# Altium PCB pcb_xl.PcbDoc
Units mm, origin at the board's own origin, x right, y up, seen from the top; angles counter-clockwise.
Board outline 29 x 100 mm, 2 copper layers (Top Layer, Bottom Layer); 39 components, 36 nets, 144 pads, 44 vias.
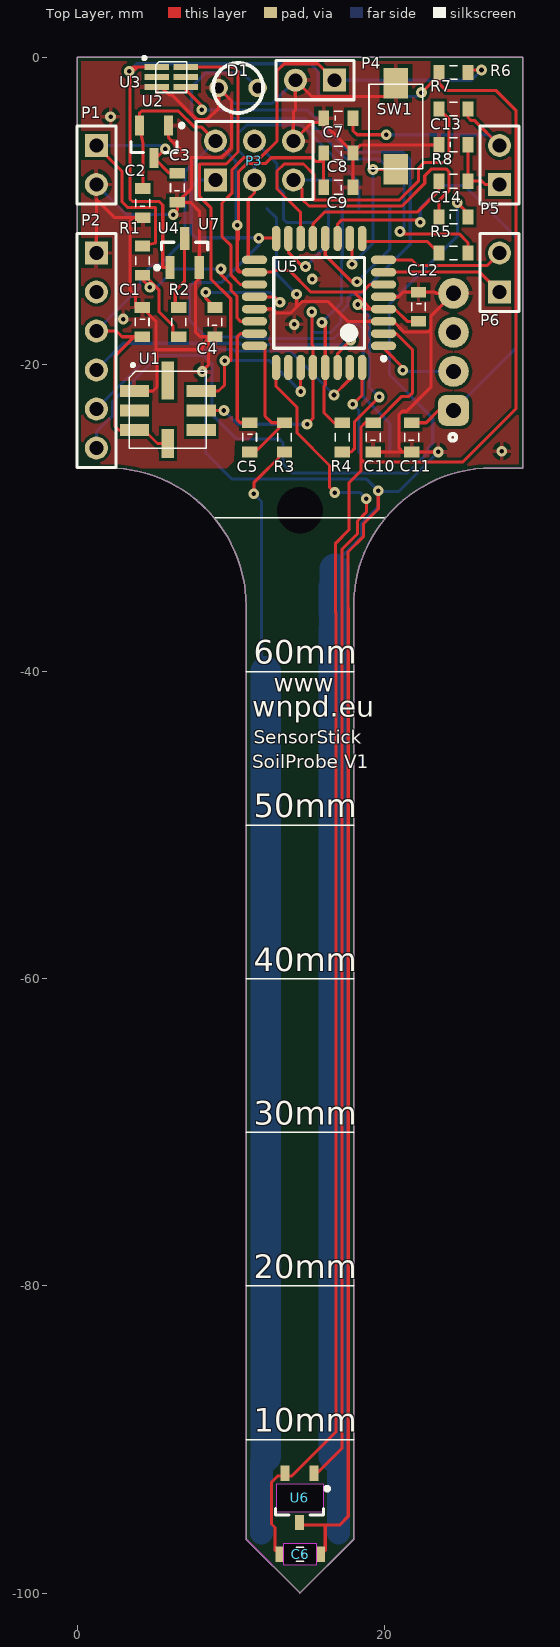
[diagram p0: Top Layer view]
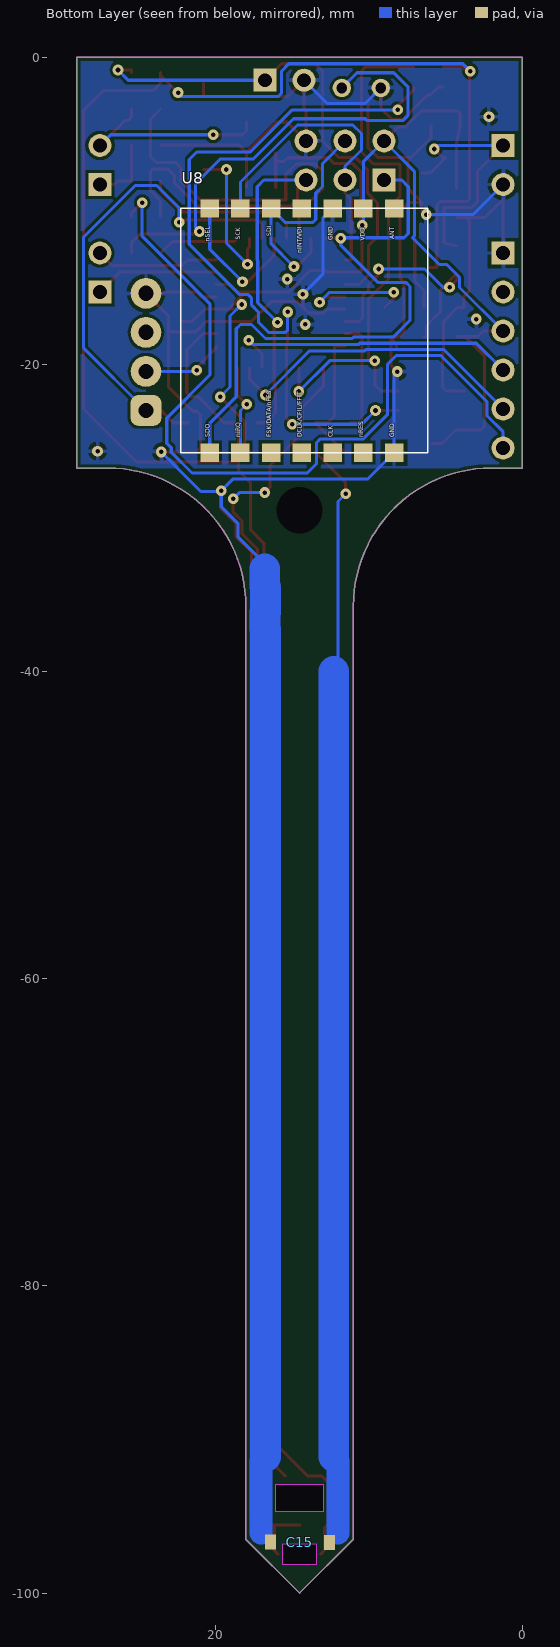
[diagram p1: Bottom Layer view, seen from below]
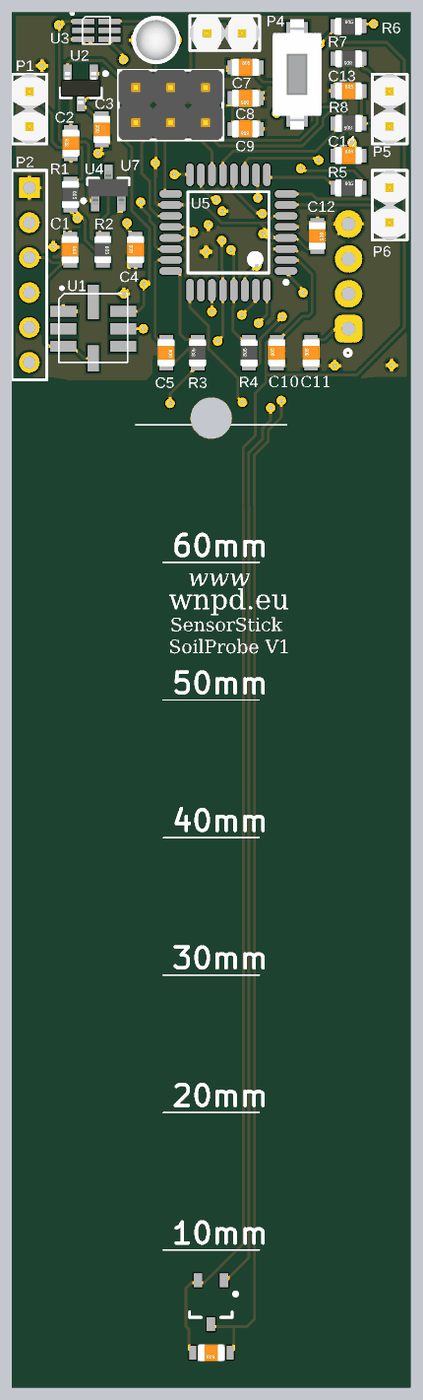
[diagram p2: 3D render of the assembled board from above, using the file's embedded part models]

## Layer stack, top to bottom
Top Layer: signal copper 0.0356
Dielectric: dielectric 0.32, FR-4, Dk 4.8
Bottom Layer: signal copper 0.0356

## Board outline
11,-35.75 ccw(c2,-35.75) 2,-26.75 0,-26.75 0,0 29,0 29,-26.75 27,-26.75 ccw(c27,-35.75) 18,-35.75 18,-96.5 14.5,-100 11,-96.5
cut-out: 12.95,-92.9 12.95,-94.7 16.05,-94.7 16.05,-92.9
cut-out: 13.425,-96.775 13.425,-98.15 15.6,-98.15 15.6,-96.775

## Design rules (kind name [scope] priority, off if disabled: settings)
Clearance "Clearance via" [IsVia vs IsPad] p1: gap=0.5
Clearance Clearance-xPP-xTP-xTT [All] p2: gap=0.2
ComponentClearance [All] p1: gap=0.2 collisioncheckmode=3 verticalgap=0.2 showdistances=FALSE
HoleSize HoleSize-PTH [All] p1: absolutevalues=TRUE maxlimit=4 minlimit=0.25 maxpercent=80.000 minpercent=20.000
HoleToHoleClearance [All] p1: gap=0.15 allowstackedmicrovias=TRUE
Length "Schematic Length Constraint" [InNet('ANTENNA')] p1: maxlimit=164.71 minlimit=164.7
MinimumAnnularRing "Minimum IAR <=0.45mm" [((ObjectKind = 'Pad') OR (ObjectKind = 'Via')) And (Layer = 'MultiLayer') And (HoleDiameter <= AsMM(0.45))] p1: minimumring=0.175 // minimum inner annular ring for pads <= 0.45mm finished hole size
MinimumSolderMaskSliver [All] p1: minsoldermaskwidth=0.1
PolygonConnect [All] p1: connectstyle=Relief reliefconductorwidth=0.254 reliefentries=4 polygonreliefangle="90 Angle" airgapwidth=0.254
RoomDefinition SoilProbe [InComponentClass('SoilProbe')] p1: confinementstyle=ConfineIn formatcopy=TRUE lockcomponents=FALSE outline -16.8,-51.75 -1,-51.75 -1,-47.25 -16.8,-47.25
RoomDefinition SensVoltageBatt [InComponentClass('SensVoltageBatt')] p2: confinementstyle=ConfineIn formatcopy=TRUE lockcomponents=FALSE outline 59.3,-21.275 72.75,-21.275 72.75,-14.275 59.3,-14.275
RoomDefinition SensorOutput [InComponentClass('SensorOutput')] p3: confinementstyle=ConfineIn formatcopy=TRUE lockcomponents=FALSE outline 30.2,-10.725 48.75,-10.725 48.75,-2.475 30.2,-2.475
RoomDefinition SensorLDR [InComponentClass('SensorLDR')] p4: confinementstyle=ConfineIn formatcopy=TRUE lockcomponents=FALSE outline 36.95,13.75 48.7,13.75 48.7,22 36.95,22
RoomDefinition RFM12B [InComponentClass('RFM12B')] p5: confinementstyle=ConfineIn formatcopy=TRUE lockcomponents=FALSE outline 61.25,-43.5 70.5,-43.5 70.5,-24 61.25,-24
RoomDefinition Regulator3v3 [InComponentClass('Regulator3v3')] p6: confinementstyle=ConfineIn formatcopy=TRUE lockcomponents=FALSE outline 19.725,17.7 34.225,17.7 34.225,24.7 19.725,24.7
RoomDefinition ArduinoDownload [InComponentClass('ArduinoDownload')] p7: confinementstyle=ConfineIn formatcopy=TRUE lockcomponents=FALSE outline 51.75,-0.08 70,-0.08 70,18.42 51.75,18.42
RoutingVias "RoutingVias <= 0.45mm" [All] p1: holewidth=0.25 width=0.7 viastyle="Through Hole" minholewidth=0.25 minwidth=0.6 maxholewidth=0.5 maxwidth=1 // finishet hole size <= 0.45mm
SilkToSilkClearance [All] p1: silktosilkclearance=0.2
SilkToSolderMaskClearance SilkscreenOverComponentPads [IsPad] p1: minsilkscreentomaskgap=0.2 clearancetoexposedcopper=TRUE
SolderMaskExpansion [All] p1: expansion=0.102
Width Width-xTW [All] p1: maxlimit=4 minlimit=0.2 preferedwidth=0.2
22 further rules are at their usual default settings.

## Classes and differential pairs
component class SoilProbe: C5 C15 R3
component class SensVoltageBatt: R1 R2 U4
component class SensorOutput: C7 C13 P5 R7 R8
component class SensorLDR: P4 R6
component class RFM12B: C8 C9 U8
component class Regulator3v3: C2 C3 U2
component class ArduinoDownload: C14 P2

## Components (designator, comment, footprint, x,y, rotation, side; value= is the part's Value field where it differs from the comment)
C1 "100n" C0805#1 4.25,-17.25 r270 top (schematic designator C14)
C2 "1u" C0805#1 4.25,-9.5 r90 top (schematic designator C10)
C3 "1u" C0805#1 6.5,-8.5 r90 top (schematic designator C9)
C4 "100n" C0805#1 8.95,-17.25 r90 top (schematic designator C1)
C5 "2n2" C0805#1 11.25,-24.75 r270 top (schematic designator C4)
C6 "100n" C0805#2 14.5,-97.5 r180 top (schematic designator C15)
C7 "100n" C0805#1 17,-3.96 r0 top (schematic designator C11)
C8 "10n" C0805#1 17,-6.26 r180 top (schematic designator C7)
C9 "220p" C0805#1 17,-8.5 r180 top (schematic designator C6)
C10 "100n" C0805#1 19.25,-24.75 r90 top (schematic designator C13)
C11 "100n" C0805#1 21.75,-24.75 r90 top (schematic designator C12)
C12 "100n" C0805#1 22.25,-16.25 r270 top (schematic designator C2)
C13 "100n" C0805#1 24.5,-5.68 r0 top (schematic designator C8)
C14 "100n" C0805#1 24.5,-10.38 r0 top (schematic designator C3)
C15 "Soil Probe" C0805#3 14.5,-95.725 r180 bottom (schematic designator C5)
D1 "LED RED" LED-3mm 11.75,-2 r180 top
P1 "9vIN" PH1x2_2.54 1.25,-5.75 r270 top (schematic designator P6)
P2 "Arduino Download interface" PH1x6_2.54 1.25,-12.75 r270 top (schematic designator P3)
P3 "ICSP" PH2x3_2.54 9,-8 r0 top (schematic designator P7)
P4 "Light sensor (LDR)" PH1x2_2.54 16.75,-1.5 r180 top (schematic designator P1)
P5 "SoilAnalogOutput" PH1x2_2.54 27.5,-8.29 r90 top
P6 "Pin Header" PH1x2_2.54 27.5,-15.29 r90 top (schematic designator P2)
R1 "RESISTOR" R0805 4.25,-13.25 r270 top (schematic designator R5)
R2 "RESISTOR" R0805 6.61,-17.25 r270 top (schematic designator R6)
R3 "RESISTOR" R0805 13.5,-24.75 r90 top (schematic designator R4)
R4 "RESISTOR" R0805 17.25,-24.75 r90 top (schematic designator R2)
R5 "RESISTOR" R0805 24.5,-12.75 r0 top (schematic designator R1)
R6 "RESISTOR" R0805 24.5,-1 r0 top (schematic designator R3)
R7 "RESISTOR" R0805 24.5,-3.37 r180 top (schematic designator R8)
R8 "RESISTOR" R0805 24.5,-8.07 r180 top (schematic designator R7)
SW1 "Tact. SMT" "Switch TACT 3.5*6" 20.75,-9 r180 top
U1 "Barometric sensor" BMP085 6,-22.75 r0 top (schematic designator U2)
U2 "MCP1703T" SOT23 5,-5.5 r270 top (schematic designator U8)
U3 "Luminosity sensor" TSL2561 7.25,-1.75 r0 top (schematic designator U5)
U4 "NMOS FDV303N" SOT-23-FET 7,-12.75 r90 top (schematic designator U7)
U5 "ATmega328P-AU" atmel_32A_N 15.75,-16 r180 top (schematic designator U1)
U6 "Soil temp. sensor" SOT-23-TT3_M 14.475,-94.2 r270 top (schematic designator U4)
U7 "Humidity Sensor" DHTXX 24.5,-23 r90 top (schematic designator U3)
U8 "RFM12b / 433Mhz" RFM12_dev 22.25,-25.75 r90 bottom (schematic designator U6)

## Footprints (in the part's own frame and the unit in brackets; to place one, negate y for a bottom-side part, rotate by r counter-clockwise, add the part's x,y. Pads: shape width x height; smd on the part's side, far side on the other; paste and mask are expansions set on the pad)
atmel_32A_N [mm] "Thin QFP, 32-Leads, Body 7x7mm, Pitch 0.8mm, IPC Medium Density"
  oval 1.65x0.55 smd: 1(-4.2,2.8) 2(-4.2,2) 3(-4.2,1.2) 4(-4.2,0.4) 5(-4.2,-0.4) 6(-4.2,-1.2) 7(-4.2,-2) 8(-4.2,-2.8) 17(4.2,-2.8) 18(4.2,-2) 19(4.2,-1.2) 20(4.2,-0.4) 21(4.2,0.4) 22(4.2,1.2) 23(4.2,2) 24(4.2,2.8)
  oval 0.55x1.65 smd: 9(-2.8,-4.2) 10(-2,-4.2) 11(-1.2,-4.2) 12(-0.4,-4.2) 13(0.4,-4.2) 14(1.2,-4.2) 15(2,-4.2) 16(2.8,-4.2) 25(2.8,4.2) 26(2,4.2) 27(1.2,4.2) 28(0.4,4.2) 29(-0.4,4.2) 30(-1.2,4.2) 31(-2,4.2) 32(-2.8,4.2)
  silkscreen extent -4.33,-2.95 2.95,3.75, body extent -3.5,-3.5 3.5,3.5, height 1.2
BMP085 [mm]
  rect 1.9x0.8 smd: 1(-2.274,1.016) 2(-2.274,-0.254) 3(-2.274,-1.524) 5(2.074,-1.524) 6(2.074,-0.254) 7(2.074,1.016)
  rect 0.8x1.9 smd: 4(-0.1,-2.4)
  rect 0.8x2.5 smd: 8(-0.1,1.7)
  silkscreen extent -2.6,-2.7 2.4,2.77, body extent -2.6,-2.7 2.4,2.3, height 1
C0805#1 [mm] "Chip Capacitor; Body 2.0 x 1.2 mm (LxW typ)"
  rect 0.7x1 smd: 1(-0.95,-0.025) 2(0.95,-0.025)
  silkscreen extent -0.25,-0.48 0.25,0.43, body extent -1,-0.65 1,0.6, height 0.78
C0805#2 [mm] "Chip Capacitor; Body 2.0 x 1.2 mm (LxW typ)"
  rect 0.5x1 smd: 1(-1.375,-0.025) 2(1.35,-0.025)
  silkscreen extent -0.25,-0.48 0.25,0.43, body extent -1,-0.65 1,0.6, height 0.78
C0805#3 [mm] "Chip Capacitor; Body 2.0 x 1.2 mm (LxW typ)"
  rect 0.7x1 smd: 1(-1.9,-0.95) 2(1.95,-0.975)
  body extent -1,-0.65 1,0.6, height 0.78
DHTXX [mm] "Sensor Humidity & Temperature"
  rrect50% 2x2 hole 1: 1(0,0)
  round 2 hole 1: 2(2.54,0) 3(5.08,0) 4(7.62,0)
  silkscreen extent -1.97,-0.17 -1.53,0.27, body extent -3.4,1.25 10.85,16.75, height 12
LED-3mm [mm]
  round 1.2 hole 0.7: 1(0,0) 2(2.54,0)
  silkscreen extent -0.36,-1.62 2.9,1.62, body extent -0.39,-1.65 2.91,1.64, height 5.51
PH1x2_2.54 [mm] "Connector; Header; 2 Position"
  rect 1.5x1.5 hole 0.9: 1(0,0)
  round 1.5 hole 0.9: 2(2.54,0)
  silkscreen extent -1.27,-1.27 3.81,1.27, body extent -1.27,-1.27 3.81,1.27, height 8.38
PH1x6_2.54 [mm] "Connector; Header; 6 Position"
  rect 1.5x1.5 hole 0.9: 1(0,0)
  round 1.5 hole 0.9: 2(2.54,0) 3(5.08,0) 4(7.62,0) 5(10.16,0) 6(12.7,0)
  silkscreen extent -1.27,-1.27 13.97,1.27
PH2x3_2.54 [mm] "Connector; Header; 3x2 Position"
  rect 1.5x1.5 hole 0.9: 1(0,0)
  round 1.5 hole 0.9: 2(0,2.54) 3(2.54,0) 4(2.54,2.54) 5(5.08,0) 6(5.08,2.54)
  silkscreen extent -1.27,-1.27 6.35,3.81, body extent -1.27,-1.27 6.35,3.81, height 10.1
R0805 [mm] "0805 SMD Resistor"
  rect 0.7x1 smd: 1(-0.95,0) 2(0.95,0)
  silkscreen extent -0.25,-0.45 0.25,0.45, body extent -1.01,-0.63 0.99,0.62, height 0.78
RFM12_dev [mm] "Wireless; Uni. ISM band FSK transceiver  module;"
  rect 1.2x1.2 smd: 1(0,-1.9) 2(0,-3.9) 3(0,-5.9) 4(0,-7.9) 5(0,-9.9) 6(0,-11.9) 7(0,-13.9) 8(15.9,-13.9) 9(15.9,-11.9) 10(15.9,-9.9) 11(15.9,-7.9) 12(15.9,-5.9) 13(15.9,-3.9) 14(15.9,-1.9)
  silkscreen extent 0,-16.1 15.9,0
SOT23 [mm] "SOT23, 3-Leads, Body 2.9x1.3mm, Pitch 0.95mm, Lead Span 2.4mm, IPC Medium Density"
  rect 1.3x0.6 smd: 1(-1.05,0.95) 2(-1.05,-0.95) 3(1.05,0)
  silkscreen extent -1.17,-1.5 0.7,1.93, body extent -1.17,-1.47 1.17,1.45, height 1
SOT-23-FET [mm] "SOT23, 3-Leads, Body 2.9x1.3mm, Pitch 0.95mm, Lead Span 2.5mm, IPC Medium Density"
  rect 1.5x0.6 smd: 1(-0.95,0.95) 2(0.95,0) 3(-0.95,-0.95)
  silkscreen extent -1.07,-1.5 0.7,1.92, body extent -1.25,-1.46 1.23,1.46, height 0.98
SOT-23-TT3_M [mm] "SOT23, 3-Leads, Body 2.9x1.3mm, Pitch 0.95mm, Lead Span 2.4mm, IPC Low Density"
  rect 1x0.6 smd: 1(-2,-0.95) 2(-2,0.95) 3(1.2,0)
  silkscreen extent -1.12,-1.55 0.7,1.93
"Switch TACT 3.5*6" [mm] "Switch, Tactile"
  rect 1.6x2 smd: 1(0,-1.7) 2(0,-7.3)
  silkscreen extent -1.75,-7.25 1.75,-1.75, body extent -1.75,-8.5 1.75,-0.5, height 9
TSL2561 [mm] "Light intensity sensor"
  rect 1.6x0.4 smd: 1(-2.075,1.1) 2(-2.075,0.45) 3(-2.075,-0.2) 4(-0.176,-0.2) 5(-0.176,0.45) 6(-0.176,1.1)
  silkscreen extent -2.95,-0.55 -0.12,1.77, body extent -2.1,-0.55 -0.13,1.45, height 1

## Part data
C15: library part 18p
D1: library part Red-3mm, "LED, Surface Mount LED Indicator"
P1 P4 P5 P6: library part PH1x2, "Con1x2"
P2: library part PH1x6, "Con1x6"
P3: library part PH2x3, "Header, 3-Pin, Dual row"
R1: library part 100K, "Resistor"
R2 R6: library part 10K, "Resistor"
R3 R4 R7 R8: library part 1K, "Resistor"
R5: library part 560R, "Resistor"
SW1: library part "Pushbutton TACT mini 3.5x6", "Switch"
U1: library part BMP085, "Sensor, Barometric"
U2: library part MCP1703T-3002E/CB, "Regulator, 5v"
U3: library part TSL2561, "Sensor, Illumination"
U4: library part IRLML0100TRPBF, "Transistor"
U5: "8-bit AVR Microcontroller, 32KB Flash, 1KB EEPROM, 2KB SRAM, 32-pin TQFP, Industrial Grade (-40°C to 85°C)"
U6: library part MCP9700AT-E/TT, "Low-Power Linear Active Thermistor IC, 3-Pin SOT-23, Extended Temperature, Tape and Reel"
U7: library part DHT11, "Humidity / Temp Sensor"
U8: library part RFM12b, "Wireless, Transceiver"

## Free pads (board coordinates)
  round 0 hole 3: 3(14.5,-29.5)

## Via types
v1: diameter 0.7, hole 0.3, Top Layer to Bottom Layer, 44 vias

## Nets (pads, with @x,y where several pads share a name; then routed paths per layer and width w, separated by ;. In a path a pad name is that pad's centre, name@x,y a point inside that pad or via, vN(x,y) a via of type N, cw(c..) or ccw(c..) an arc to the next point about the centre after c; other vN are vias at no path point)
3V3: C1.2 C2.2 C8.2 C9.2 C12.2 P2.3 P3.2 R4.1 U1.3 U1.4 U2.2 U5.4 U5.6 U5.18 U8.9 | length 90.1
  Top Layer w0.2: P2.3 2.549,-17.83 2.919,-18.2 3.718,-18.2 ; C1.2 3.718,-18.2 ; C2.2 4.275,-5.631 U2.2 4.05,-3.651 4.202,-3.499 6.58,-3.499 7.615,-4.534 8.074,-4.534 P3.2 ; U1.4 5.229,-25.15 4.353,-24.274 U1.3 2.702,-24.274 2.473,-24.045 2.473,-19.445 3.718,-18.2 ; v1(10.423,-10.943) 10.423,-11.946 ; C9.2 16.05,-6.796 ; C8.2@16.05,-6.225 16.05,-6.796 ; R4.1 17.84,-25.7 18.069,-25.471 18.069,-23.72 v1(19.669,-22.119) ; v1(18.272,-16.1) 18.572,-16.4 19.11,-16.4 ; U5.6 19.051,-14.8 18.551,-15.3 18.031,-15.3 ; C12.2 21.485,-17.2 20.685,-16.4 U5.4 19.11,-16.4 ; 10.423,-13.752 10.423,-11.946 ; 10.423,-13.752 10.423,-13.873 10.55,-14 10.671,-14 ; 10.423,-13.752 10.671,-14 ; 10.423,-11.946 10.49,-11.88 10.49,-7.473 11.033,-6.93 12.25,-6.93 12.63,-6.55 15.284,-6.55 15.53,-6.796 16.05,-6.796 ; 10.671,-14 U5.18 12.72,-14 12.845,-13.875 13.801,-13.875 15.226,-15.3 18.031,-15.3 ; 18.031,-15.3 18.549,-15.828 19.11,-16.4
  Bottom Layer w0.2: P2.3 4.084,-14.996 4.084,-14.332 4.916,-13.5 5.403,-13.5 7.143,-11.76 7.026,-11.643 7.026,-7.434 P3.2 10.35,-6.81 U8.9 10.35,-10.87 v1(10.423,-10.943) ; v1(18.272,-16.1) 19.025,-16.853 19.025,-21.476 v1(19.669,-22.119)
9V0: C3.2 P1.1 R1.1 U2.3 | length 17.3
  Top Layer w0.2: P1.1 2.905,-7.405 2.905,-9.394 3.311,-9.8 5.089,-9.8 5.089,-12.086 R1.1 ; v1(5.737,-5.978) 5.165,-6.55 U2.3 6,-7.55 C3.2
  Bottom Layer w0.2: P1.1 5.509,-5.75 v1(5.737,-5.978)
AN4_SDA: U1.7 U3.6 U5.27 | length 36.3
  Top Layer w0.2: U3.6 10.22,-0.65 10.474,-0.904 10.474,-6.175 9.699,-6.95 7.95,-6.95 7.95,-9.05 8.706,-9.806 8.706,-14.438 10,-15.732 10,-19.757 v1(9.61,-19.757) ; U1.7 9.204,-21.734 9.6,-21.338 v1@9.6,-19.757 ; v1(14.55,-21.764) U5.27
  Bottom Layer w0.2: v1(9.61,-19.757) 12.543,-19.757 v1(14.55,-21.764)
AN5_SCL: U1.6 U3.4 U5.28 | length 47.8
  Top Layer w0.2: U3.4 7.074,-2.124 8.112,-3.162 v1(8.112,-3.425) ; U1.6 v1(9.555,-23.004) ; v1(14.97,-23.897) 15.35,-23.517 U5.28 15.35,-18.766 15.275,-18.69 v1(15.275,-16.582)
  Bottom Layer w0.2: v1(8.112,-3.425) 14.97,-3.425 17.713,-6.168 21.193,-6.168 21.686,-6.661 21.686,-12.189 18.434,-15.441 17.882,-15.441 17.622,-15.701 17.622,-16.147 17.172,-16.597 17.172,-17.265 16.519,-17.918 15.427,-17.918 15.275,-17.766 v1(15.275,-16.582) ; v1(9.555,-23.004) 10.449,-23.897 v1(14.97,-23.897)
ANTENNA: U8.8
AREF: C4.2 U5.20 | length 8.1
  Top Layer w0.2: v1(8.366,-15.312) 8.366,-15.691 C4.2 ; U5.20 12.844,-15.6 v1(13.198,-15.954)
  Bottom Layer w0.2: v1(8.366,-15.312) 12.556,-15.312 v1(13.198,-15.954)
BATTVOLT-ANX: R1.2 R2.2 U5.22 | length 16
  Top Layer w0.2: v1(4.734,-14.982) 4.25,-14.498 R1.2 4.378,-14.2 5.318,-15.14 5.318,-16.557 6.232,-17.471 6.232,-18.2 R2.2@6.385,-18.2 ; v1(9.356,-13.788) 9.382,-13.788 9.382,-14.165 10.017,-14.8 10.017,-15.183 10.4,-15.566 10.4,-16.974 10.626,-17.2 U5.22
  Bottom Layer w0.2: v1(4.734,-14.982) 5.165,-14.982 6.359,-13.788 v1(9.356,-13.788)
D10_SS: U5.12 U8.14 | length 9.5
  Top Layer w0.2: U5.12 16.15,-12.899 17.877,-14.626 v1(18.221,-14.626)
  Bottom Layer w0.2: v1(18.221,-14.626) 20.35,-12.497 U8.14
D11_MOSI: P3.4 U5.15 U8.12 | length 16.1
  Top Layer w0.2: U5.15 13.75,-12.696 14.69,-13.636 v1(14.868,-13.636)
  Bottom Layer w0.2: P3.4 13.014,-6.934 13.014,-8.419 13.446,-8.851 13.446,-10.57 13.641,-10.766 15.434,-10.766 U8.12 16.35,-12.154 v1(14.868,-13.636)
D12_MISO: P3.1 U5.16 U8.1 | length 39.8
  Top Layer w0.2: v1(11.82,-11.782) 12.95,-11.782 U5.16
  Bottom Layer w0.2: P3.1 7.855,-8 7.426,-8.429 7.426,-11.477 7.705,-11.756 11.795,-11.756 v1(11.82,-11.782) 11.82,-12.249 9.407,-14.662 7.578,-14.662 7.309,-14.931 7.309,-17.126 8.408,-18.225 10.983,-18.225 11.076,-18.318 16.722,-18.318 17.635,-17.405 18.348,-17.405 18.625,-17.682 18.625,-22.117 20.35,-23.842 U8.1
D13_SCK: P3.3 U5.17 U8.13 | length 20.6
  Top Layer w0.2: P3.3 11.54,-8.839 11.137,-9.242 11.137,-13.2 U5.17
  Bottom Layer w0.2: P3.3 11.54,-7.108 10.474,-6.042 10.474,-4.969 11.033,-4.41 14.634,-4.41 18.35,-8.126 U8.13
DHT11_DATA: U5.1 U7.2 | length 5.9
  Top Layer w0.2: U5.1 19.95,-18.95 21.375,-20.375 v1(21.195,-20.375)
  Bottom Layer w0.2: v1(21.195,-20.375) 21.11,-20.46 U7.2
DHT11_ENABLE: C11.2 U5.11 U7.1 | length 31.7
  Top Layer w0.2: U5.11 16.95,-10.867 17.228,-10.589 22.184,-10.589 v1(22.336,-10.74) ; C11.2 22.717,-23.8 23.517,-23 U7.1
  Bottom Layer w0.2: v1(22.336,-10.74) 22.336,-9.814 23.8,-8.35 25.203,-8.35 28.559,-11.705 28.559,-18.941 U7.1
DTR: C14.2 P2.6 | length 52.3
  Top Layer w0.2: v1(24.749,-9.47) 25.45,-10.171 C14.2
  Bottom Layer w0.2: P2.6 1.25,-24.395 2.3,-23.345 2.3,-22.426 5.301,-19.425 8.201,-19.425 8.776,-20 8.776,-20.177 8.787,-20.188 8.787,-23.287 10.35,-24.85 13.15,-24.85 13.4,-25.1 13.4,-26.475 14,-27.075 21.5,-27.075 22.854,-25.721 22.854,-25.431 23.15,-25.135 23.15,-23.5 20.344,-20.694 20.344,-16.059 24.749,-11.655 v1(24.749,-9.47)
ENABLE_EXT_SENSORS: C6.2 C10.2 R6.1 U3.1 U4.1 U5.2 U6.1 | length 163.7
  Top Layer w0.2: v1(3.387,-0.91) 3.648,-0.65 3.902,-0.65 ; U3.1 3.902,-0.65 ; U4.1 5.572,-13.7 5.572,-9.629 5.343,-9.4 3.597,-9.4 3.438,-9.242 3.438,-1.114 3.902,-0.65 ; C6.2@13.125,-97.463 12.875,-97.213 12.875,-95.724 12.65,-95.499 12.65,-92.775 13.05,-92.375 13.975,-92.375 16.85,-89.5 16.85,-36.198 16.83,-36.178 16.83,-31.645 17.7,-30.775 17.7,-27.7 18.475,-26.925 18.475,-26.174 ; U5.2 20.786,-18 21.845,-19.059 21.845,-21.838 21.599,-22.084 21.133,-22.084 19.417,-23.8 C10.2 18.75,-23.8 18.475,-24.075 18.475,-25.175 18.475,-26.174 ; v1(22.412,-2.307) R6.1@23.55,-1.169 ; R6.1 R6.1@23.55,-1.169 ; 18.475,-26.174 18.651,-26.35 19.089,-26.35 19.1,-26.361 25.104,-26.361 28.559,-22.907 28.559,-3.45 27.289,-2.18 24.038,-2.18 23.55,-1.693 R6.1@23.55,-1.169
  Bottom Layer w0.2: v1(3.387,-0.91) 3.87,-0.428 15.198,-0.428 15.681,-0.91 15.681,-2.355 15.876,-2.55 15.989,-2.55 16,-2.561 22.209,-2.561 22.412,-2.358 v1(22.412,-2.307)
FU_1: U5.26
FU_2: P6.1 U5.7 | length 8.1
  Top Layer w0.2: U5.7 26.21,-14 P6.1
FU_3: P6.2 U5.8 | length 8
  Top Layer w0.2: U5.8 21.802,-13.2 22.162,-13.56 26.69,-13.56 P6.2
GND: C1.1 C2.1 C3.1 C4.1 C6.1 C7.1 C8.1 C9.1 C10.1 C11.1 C12.1 C13.1 C15.1 D1.2 P1.2 P2.1 P3.6 P4.2 SW1.2 U1.1 U2.1 U3.3 U4.3 U5.3 U5.5 U5.21 U6.3 U7.4 U8.7 U8.10 | length 301.3
  Top Layer w0.2: P2.1 1.25,-10.537 1.25,-9.252 2.448,-10.45 3.652,-10.45 ; U1.1 4.937,-21.734 5.191,-21.48 5.191,-19.605 5.14,-19.046 ; C2.1 3.652,-10.45 ; U3.3 5.474,-1.95 5.974,-2.45 6.157,-2.45 7.782,-4.075 8.454,-4.075 9.21,-3.319 D1.2 10.05,-2.84 10.05,-5.895 9.421,-6.524 7.223,-6.524 ; U2.1 5.95,-5.251 7.223,-6.524 ; v1(6.25,-10.25) 6.525,-9.975 C3.1 ; v1(8.137,-20.468) 8.544,-20.062 8.544,-18.2 C4.1@8.525,-18.2 ; U5.21 12.698,-16.4 12.955,-16.656 13.902,-16.656 14.284,-16.275 ; v1(14.284,-15.439) 14.284,-16.275 ; U6.3@14.475,-95.575 16.1,-95.575 ; C6.1@15.9,-97.463 16.15,-97.213 16.15,-95.625 16.1,-95.575 ; C9.1 C8.1@17.95,-6.225 ; C10.1 21.193,-25.7 ; v1(19.6,-28.225) 19.6,-29.416 18.65,-30.366 18.65,-31.196 17.63,-32.216 17.63,-35.846 17.65,-35.866 17.65,-95 17.075,-95.575 16.1,-95.575 ; U5.5 20.913,-15.6 21.213,-15.3 C12.1 23.301,-15.3 23.381,-15.38 U7.4 23.047,-16.833 23.047,-17.674 ; SW1.2 20.75,-2.561 15.271,-2.561 P4.2 14.21,-3.422 14.08,-3.552 P3.6 15.305,-4.235 16.05,-4.235 16.05,-4.294 17.95,-6.194 C8.1@17.95,-6.225 ; v1(23.504,-25.7) C11.1 21.193,-25.7 ; C13.1 18.47,-5.705 C8.1@17.95,-6.225 ; 3.652,-10.45 3.438,-10.664 3.438,-15.211 3.794,-15.566 3.794,-16.3 C1.1 5.14,-17.215 5.14,-19.046 ; 5.14,-19.046 8.086,-19.046 C4.1@8.525,-18.2 ; C3.1 7.451,-8.524 7.451,-6.752 7.223,-6.524 ; C3.1 7.375,-9.45 7.95,-10.025 U4.3 7.95,-14.398 7.716,-14.632 7.716,-17.913 8.002,-18.2 C4.1@8.525,-18.2 ; 14.284,-16.275 14.641,-15.917 16.342,-15.917 17.625,-17.2 U5.3 20.591,-17.2 21.294,-17.903 22.818,-17.903 23.047,-17.674 ; 21.193,-25.7 20.964,-25.471 20.964,-23.262 21.174,-23.053 21.451,-23.053 23.047,-21.457 23.047,-17.674
  Bottom Layer w0.2: P1.2 3.21,-10.25 v1(6.25,-10.25) ; v1(8.137,-20.468) 8.35,-20.681 U8.7 10.075,-27.475 18.85,-27.475 v1(19.6,-28.225) v1@19.6,-28.275 ; D1.2 10.229,-3.019 12.691,-3.019 P4.2 ; U8.10 12.986,-10.486 12.986,-14.142 v1(14.284,-15.439) ; 16.775,-33.325 16.775,-32.975 18.5,-31.25 18.5,-30.375 19.6,-29.275 v1@19.6,-28.275 ; v1(23.504,-25.7) 20.929,-28.275 v1@19.6,-28.275
  Bottom Layer w1.5: 16.726,-91.128 17,-91.403 17,-96.086
  Bottom Layer w2: 16.726,-91.128 16.726,-37.249 16.75,-37.225 16.75,-36.165 16.726,-36.141 16.726,-34.5 16.775,-34.45 16.775,-33.325
  other v1: 27.65,-25.65 14.125,-17.4 3,-17.05 15.3,-14.45 2.175,-3.875
"HUMIDITY VOUT": C13.2 P5.1 R8.1 | length 4.5
  Top Layer w0.2: C13.2 R8.1 26.349,-8.07 26.569,-8.29 P5.1
LDR_ANX: P4.1 R6.2 U5.19 | length 32.7
  Top Layer w0.2: U5.19 10.626,-14.8 10.023,-14.197 10.023,-12.28 9.426,-11.683 9.426,-9.499 10.09,-8.835 10.09,-7.307 10.873,-6.524 11.961,-6.524 13.014,-5.471 13.014,-0.885 13.471,-0.428 15.678,-0.428 P4.1 ; R6.2 25.45,-0.834 v1(26.324,-0.834)
  Bottom Layer w0.2: P4.1 25.658,-1.5 v1(26.324,-0.834)
LED_RED: R5.1 U5.9 | length 5.4
  Top Layer w0.2: U5.9 18.75,-12 22.8,-12 R5.1
NetC15_2: C15.2 R3.1 | length 71.6
  Top Layer w0.2: v1(11.5,-28.425) 11.5,-27.7 R3.1
  Bottom Layer w0.2: v1(11.5,-28.425) 12,-28.925 12,-39.726 12.274,-40
  Bottom Layer w1.5: 12,-96.086 12,-91.403 12.274,-91.128
  Bottom Layer w2: 12.274,-91.128 12.274,-40
NetD1_1: D1.1 R5.2 | length 31.4
  Top Layer w0.2: v1(21.015,-11.35) 21.167,-11.502 24.866,-11.502 25.45,-12.086 R5.2
  Bottom Layer w0.2: D1.1 10.762,-1.012 8.366,-1.012 7.451,-1.926 7.451,-3.806 7.782,-4.136 10.09,-4.136 10.216,-4.01 14.894,-4.01 17.509,-6.625 19.668,-6.625 21.269,-8.226 21.269,-11.096 v1(21.015,-11.35)
NetR2_1: R2.1 U4.2 | length 4.8
  Top Layer w0.2: R2.1@6.385,-16.3 6.385,-15.211 7,-14.596 U4.2
PWM_16BITA: R8.2 U5.13 | length 10.7
  Top Layer w0.2: U5.13 15.35,-10.842 16.099,-10.092 22.145,-10.092 23.55,-8.688 R8.2
PWM_16BITB: R7.2 U5.14 | length 23.4
  Top Layer w0.2: U5.14 14.55,-10.117 13.014,-8.581 13.014,-7.407 13.471,-6.95 14.734,-6.95 15.4,-7.616 15.4,-9.292 20.99,-9.292 22.231,-8.051 22.231,-7.21 22.57,-6.87 23.819,-6.87 24.215,-6.473 24.215,-4.035 R7.2
RESET: C14.1 P3.5 R4.2 U5.29 | length 36
  Top Layer w0.2: P3.5 14.64,-8.56 14.64,-9.242 15.09,-9.692 21.155,-9.692 22.631,-8.217 22.631,-7.715 23.076,-7.27 24.024,-7.27 24.2,-7.446 24.2,-8.694 23.55,-9.344 C14.1 ; v1(15.935,-17.268) 16.15,-17.483 U5.29 16.15,-21.342 16.072,-21.42 16.072,-23.15 16.722,-23.8 R4.2
  Bottom Layer w0.2: P3.5 16.827,-8 17.256,-8.429 17.256,-13.199 17.222,-13.233 17.222,-15.981 v1(15.935,-17.268)
"RFM12 INT": U5.32 U8.2 | length 6
  Top Layer w0.2: v1(17.944,-22.599) 18.55,-21.992 U5.32
  Bottom Layer w0.2: v1(17.944,-22.599) 18.35,-23.005 U8.2
RS232_RXD_MISO: P2.4 U5.30 | length 19.6
  Top Layer w0.2: U5.30 16.95,-19.301 v1(17.815,-18.436)
  Bottom Layer w0.2: P2.4 2.995,-18.625 10.583,-18.625 10.676,-18.718 17.533,-18.718 v1(17.815,-18.436)
RS232_TXD_MOSI: P2.5 U5.31 | length 20.6
  Top Layer w0.2: v1(16.722,-21.992) 17.688,-21.027 17.75,-21.027 U5.31
  Bottom Layer w0.2: P2.5 5.135,-19.025 10.153,-19.025 10.25,-19.122 13.852,-19.122 v1(16.722,-21.992)
"SOIL MOISURE VOUT": C7.2 P5.2 R7.1 | length 13.9
  Top Layer w0.2: C7.2@17.95,-4.235 17.95,-4.771 18.229,-5.051 v1(20.126,-5.051) ; R7.1 25.45,-3.923 25.663,-4.136 25.886,-4.136 P5.2
  Bottom Layer w0.2: v1(20.126,-5.051) 26.801,-5.051 P5.2
SOIL_AN0: C5.1 U5.23 | length 7.5
  Top Layer w0.2: C5.1 10.626,-23.8 10.423,-23.597 10.423,-18.203 10.626,-18 U5.23
SOIL_AN1: C5.2 R3.2 U5.24 | length 9.8
  Top Layer w0.2: C5.2 11.6,-25.7 R3.2 12.658,-23.8 12.227,-23.368 12.227,-18.8 U5.24
SW1: SW1.1 U5.10 | length 10
  Top Layer w0.2: U5.10 17.75,-12.34 17.891,-12.481 v1(17.891,-13.483) ; v1(19.262,-7.311) 20.75,-7.311 SW1.1
  Bottom Layer w0.2: v1(17.891,-13.483) 19.262,-12.112 v1(19.262,-7.311)
"TEMP SENSOR ANALOG": U5.25 U6.2 | length 77
  Top Layer w0.2: U5.25 12.95,-21.434 14.309,-22.793 14.309,-24.459 16.43,-26.58 16.43,-28.005 v1(16.775,-28.35) ; U6.2@15.425,-92.375 17.25,-90.55 17.25,-36.032 17.23,-36.012 17.23,-32.05 18.25,-31.03 18.25,-30.2 18.825,-29.625 v1(18.825,-28.75)
  Bottom Layer w0.2: v1(16.775,-28.35) 18.425,-28.35 v1(18.825,-28.75)
pads on no net: P2.2 U1.2 U1.5 U1.8 U3.2 U3.5 U7.3 U8.3 U8.4 U8.5 U8.6 U8.11

## Polygon pours and split planes (outlines as drawn)
GND on Bottom Layer "Bottom Layer-No Net" (solid, remove dead copper, pour order 2): 0,-26.75 29,-26.75 29,0 0,0
GND on Top Layer "Bottom Layer-No Net" (solid, remove dead copper, pour order 4): 0,-26.75 29,-26.75 29,0 0,0

## Keep-outs
Keep-Out Layer:
  the board outline again, w0.1

## Other copper
Top Layer:
  pour cut-out: 10.25,-24.925 11.175,-24.925 12.85,-23.25 14.059,-23.25 14.35,-23.541 14.35,-26.55 12.5,-28.4 12.5,-28.5 10.475,-28.5 10.35,-28.375 9,-28.375 9,-27.5 10.2,-26.3

## Silkscreen, mask and mechanical layers (free items; w line width, h text height)
Top Overlay:
  lines w0.1: 9,-30 20,-30 ; 11,-90 18,-90 ; 11,-80 18,-80 ; 11,-70 18,-70 ; 11,-60 18,-60 ; 11,-50 18,-50 ; 11,-40 18,-40
  text "60mm" at 11.5,-39.5 h1.52
  text "www" at 12.8,-41.7 h2
  text "wnpd.eu" at 11.4,-43.4 h2.3
  text "SensorStick" at 11.5,-45 h1.52
  text "SoilProbe V1" at 11.4,-46.6 h1.52
  text "50mm" at 11.5,-49.5 h1.52
  text "40mm" at 11.5,-59.5 h1.52
  text "30mm" at 11.5,-69.5 h1.52
  text "20mm" at 11.5,-79.5 h1.52
  text "10mm" at 11.5,-89.5 h1.52
Mechanical 30:
  lines w0.1: 12.95,-94.7 12.95,-92.9 16.05,-92.9 16.05,-94.7 12.95,-94.7 ; 13.425,-98.15 13.425,-96.775 15.6,-96.775 15.6,-98.15 13.425,-98.15

## Text inside footprints (layer, text, board x,y; h text height)
U8: Bottom Overlay "SDO" at 20.25,-24.75 h0.5 r270; Bottom Overlay "nIRQ" at 18.25,-24.75 h0.5 r270; Bottom Overlay "FSK/DATA/nFFS" at 16.25,-24.75 h0.5 r270; Bottom Overlay "DCLK/CFIL/FFIT" at 14.25,-24.75 h0.5 r270; Bottom Overlay "CLK" at 12.25,-24.75 h0.5 r270; Bottom Overlay "nRES" at 10.25,-24.75 h0.5 r270; Bottom Overlay "GND" at 8.25,-24.75 h0.5 r270; Bottom Overlay "ANT" at 8.25,-11.867 h0.5 r270; Bottom Overlay "VDD" at 10.15,-11.95 h0.5 r270; Bottom Overlay "GND" at 12.25,-11.928 h0.5 r270; Bottom Overlay "nINT/VDI" at 14.25,-12.75 h0.5 r270; Bottom Overlay "SDI" at 16.25,-11.666 h0.5 r270; Bottom Overlay "SCK" at 18.25,-11.88 h0.5 r270; Bottom Overlay "nSEL" at 20.25,-12.029 h0.5 r270